# Altium PCB Boost_Converter_Pcb.PcbDoc
Units mm, origin at the board's own origin, x right, y up, seen from the top; angles counter-clockwise.
Board outline 90.25 x 70.35 mm, 2 copper layers (Top Layer, Bottom Layer); 38 components, 31 nets, 92 pads, 0 vias.
Unrouted connection lines stored in the file: 1.
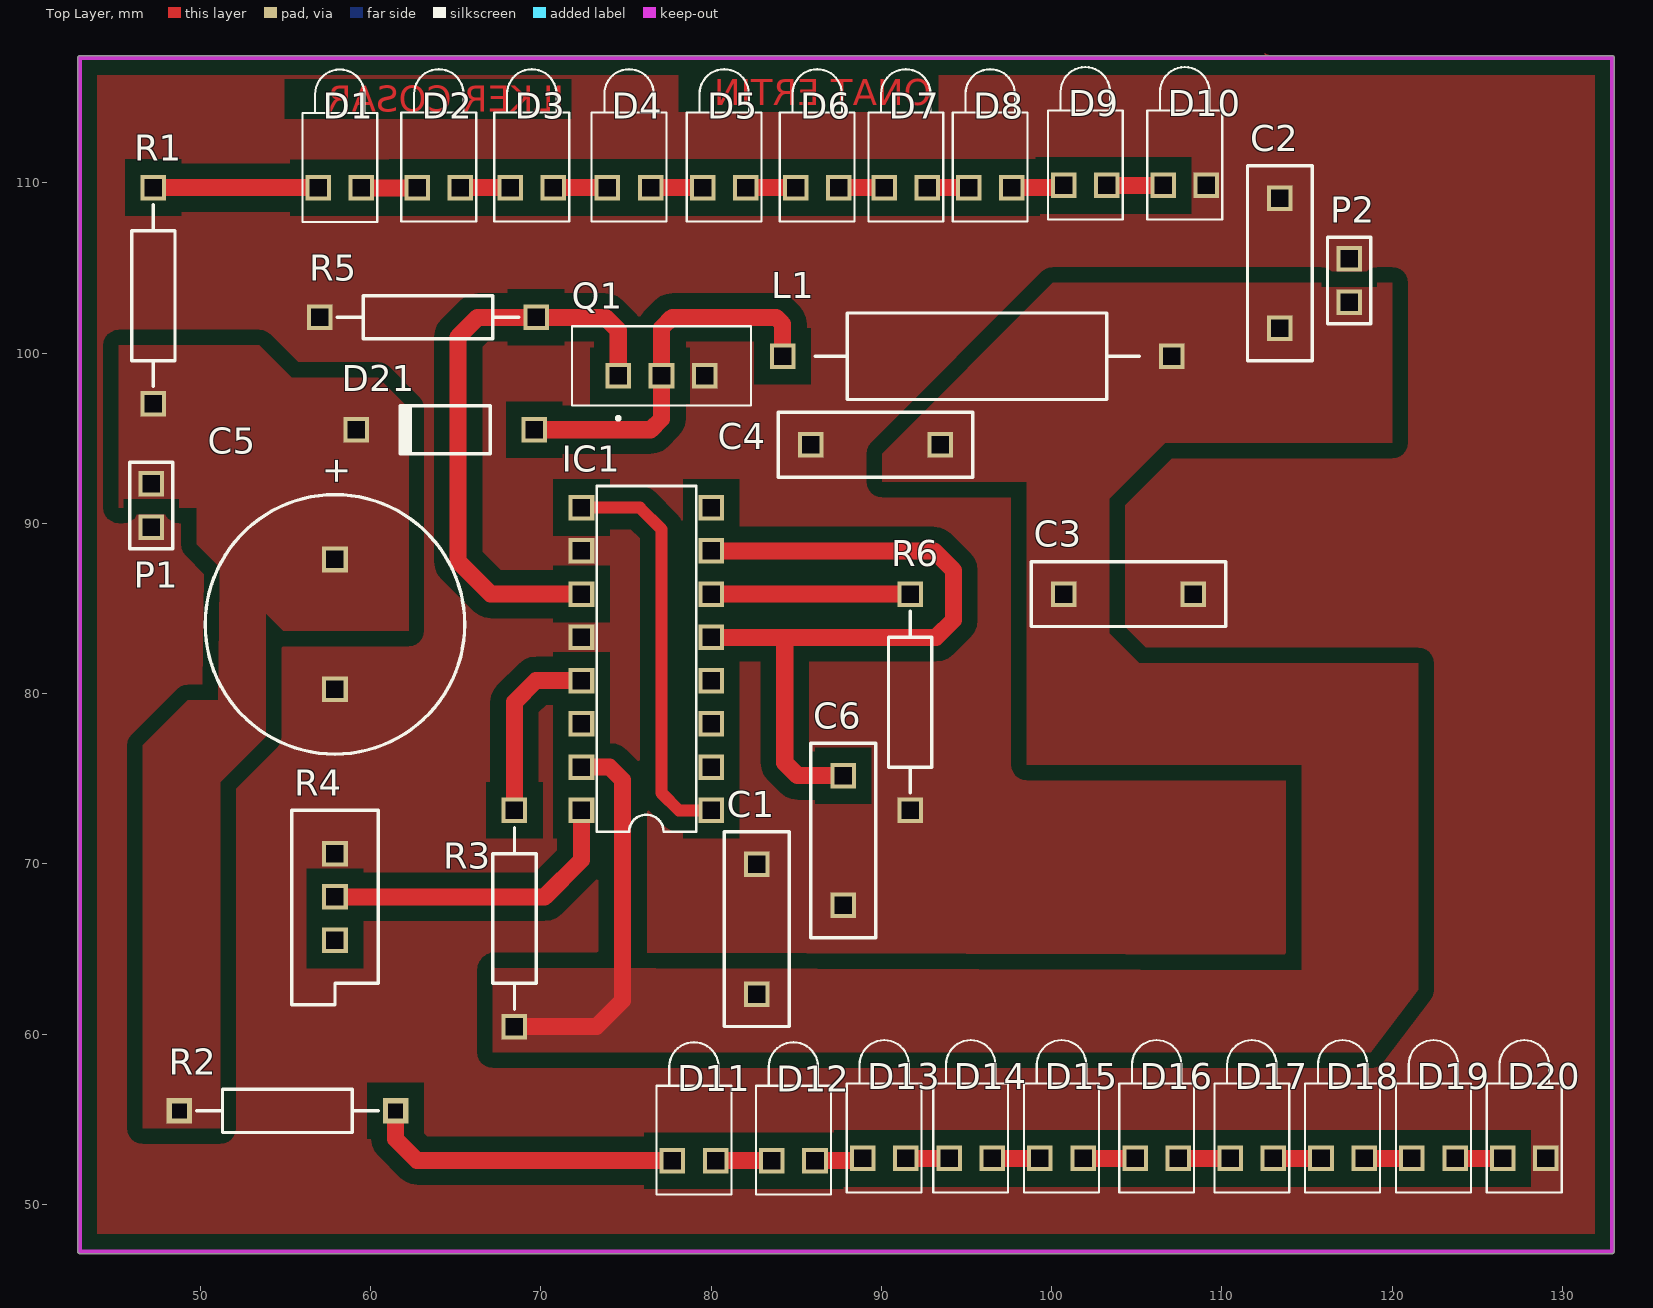
[diagram p0: Top Layer view]
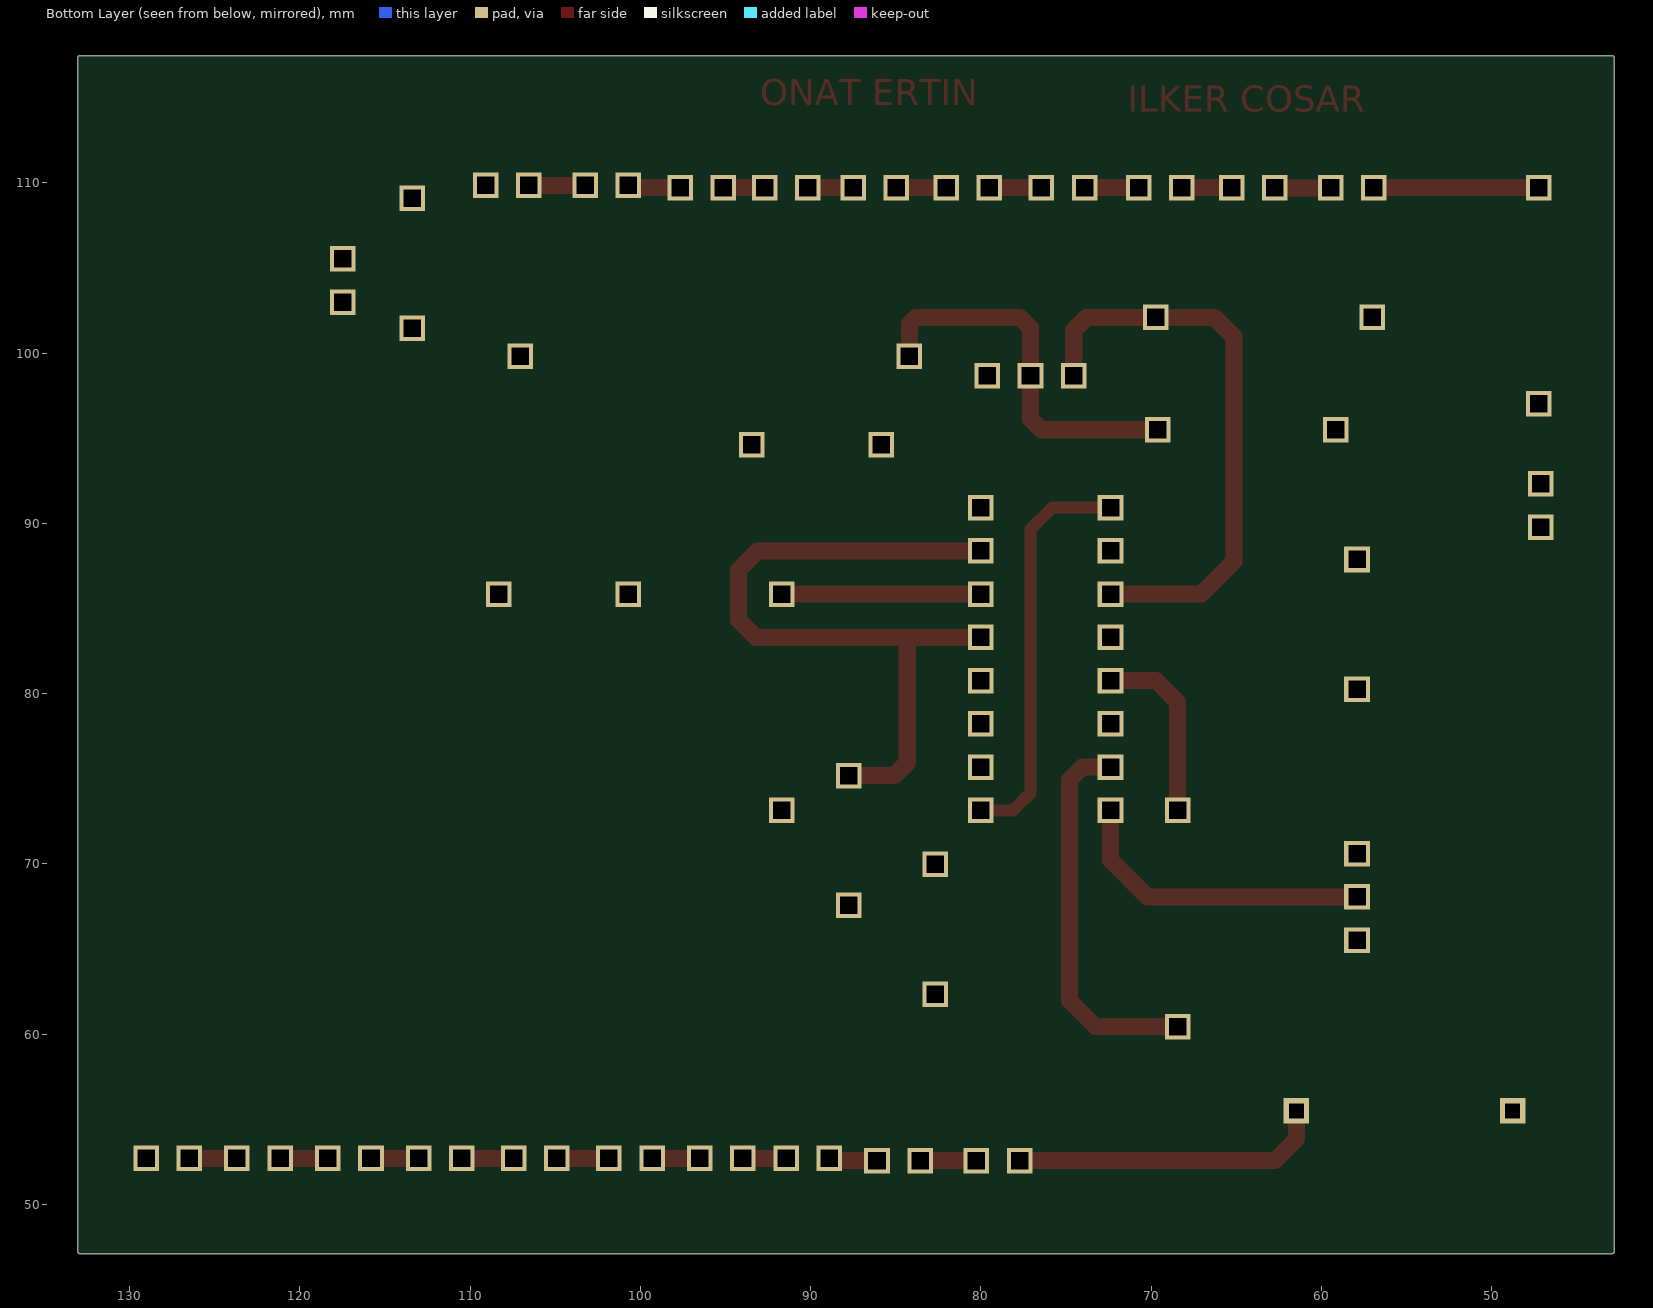
[diagram p1: Bottom Layer view, seen from below]

## Layer stack, top to bottom
Top Solder: solder mask 0.0102, Solder Resist, Dk 3.5
Top Layer: signal copper 0.0356
Dielectric 1: dielectric 0.32, FR-4, Dk 4.8
Bottom Layer: signal copper 0.0356
Bottom Solder: solder mask 0.0102, Solder Resist, Dk 3.5

## Board outline
42.926,47.119 cw(c42.926,47.244) 42.812,47.296 cw(c42.926,47.348) 42.801,47.348 42.801,117.348 cw(c42.926,117.348) 42.926,117.473 132.926,117.473 cw(c132.926,117.348) 133.051,117.348 133.051,117.347 133.051,47.244 cw(c132.926,47.244) 132.926,47.119

## Design rules (kind name [scope] priority, off if disabled: settings)
Clearance [All] p1: gap=0.152 ignorepadtopadclearanceinfootprint=TRUE except(0.9: Arc-Fill Arc-Poly Arc-Region Track-Fill Track-Poly Track-Region SMDPad-Fill SMDPad-Poly SMDPad-Region THPad-Fill THPad-Poly THPad-Region Via-Fill Via-Poly Via-Region Fill-Fill Fill-Poly Fill-Region Poly-Poly Poly-Region Region-Region)
HoleToHoleClearance [All] p1: gap=0.152 allowstackedmicrovias=TRUE
MinimumSolderMaskSliver [All] p1: minsoldermaskwidth=0.152
PolygonConnect [All] p1: connectstyle=Direct reliefconductorwidth=1 reliefentries=4 polygonreliefangle="90 Angle" airgapwidth=0.5
RoomDefinition Boost_Converter [InComponentClass('Boost_Converter')] p1: confinementstyle=ConfineIn formatcopy=TRUE lockcomponents=FALSE outline 43.053,46.863 132.588,46.863 132.588,117.221 43.053,117.221
RoutingVias [All] p1: holewidth=0.711 width=1.27 viastyle="Through Hole" minholewidth=0.711 minwidth=1.27 maxholewidth=0.711 maxwidth=1.27
SilkToSilkClearance [All] p1: silktosilkclearance=0.152
SilkToSolderMaskClearance [IsPad] p1: minsilkscreentomaskgap=0.152 clearancetoexposedcopper=TRUE
SolderMaskExpansion [All] p1: expansion=0.102
Width [All] p1: maxlimit=2 minlimit=0.5 preferedwidth=1
26 further rules are at their usual default settings.

## Classes and differential pairs
component class Boost_Converter: C1 C2 C3 C4 C5 C6 D1 D2 D3 D4 D5 D6 D7 D8 D9 D10 D11 D12 D13 D14 D15 D16 D17 D18 D19 D20 D21 IC1 L1 P1 P2 Q1 R3 R4 R5 R6

## Components (designator, comment, footprint, x,y, rotation, side; value= is the part's Value field where it differs from the comment)
C1 "Cap" RAD-0.3 82.677,66.167 r270 top value=100uF
C2 "Cap" RAD-0.3 113.411,105.283 r270 top value=22uF
C3 "Cap" RAD-0.3 104.521,85.852 r180 top value=100nF
C4 "Cap" RAD-0.3 89.662,94.615 r0 top value=47nF
C5 "Cap Pol1" RB7.6-15 57.912,84.074 r90 top value=100pF
C6 "Cap" RAD-0.3 87.757,71.374 r90 top value=100nF
D1 "LED1" LED-1 58.195,109.713 r90 top
D2 "LED1" LED-1 64.008,109.728 r90 top
D3 "LED1" LED-1 69.469,109.728 r90 top
D4 "LED1" LED-1 75.184,109.728 r90 top
D5 "LED1" LED-1 80.772,109.728 r90 top
D6 "LED1" LED-1 86.233,109.728 r90 top
D7 "LED1" LED-1 91.44,109.728 r90 top
D8 "LED1" LED-1 96.393,109.728 r90 top
D9 "LED1" LED-1 101.981,109.855 r90 top
D10 "LED1" LED-1 107.823,109.855 r90 top
D11 "LED1" LED-1 78.994,52.578 r90 top
D12 "LED1" LED-1 84.836,52.578 r90 top
D13 "LED1" LED-1 90.17,52.705 r90 top
D14 "LED1" LED-1 95.25,52.705 r90 top
D15 "LED1" LED-1 100.584,52.705 r90 top
D16 "LED1" LED-1 106.172,52.705 r90 top
D17 "LED1" LED-1 111.76,52.705 r90 top
D18 "LED1" LED-1 117.094,52.705 r90 top
D19 "LED1" LED-1 122.428,52.705 r90 top
D20 "LED1" LED-1 127.762,52.705 r90 top
D21 "Diode 1N4007" DO-41 64.389,95.504 r180 top
IC1 "SG3525A" SG3525A 80.01,73.152 r90 top
L1 "Inductor Iron" AXIAL-0.9 95.631,99.822 r180 top value=10mH
P1 "Header 2" HDR1X2 47.117,92.329 r270 top
P2 "Header 2" HDR1X2 117.475,102.997 r90 top
Q1 "IRF540" TO254P1052X465X1989-3 74.549,98.679 r0 top
R1 "Res Semi" AXIAL-0.5#1 47.244,103.378 r270 top value=1K
R2 "Res Semi" AXIAL-0.5#2 55.118,55.499 r180 top value=1K
R3 "Res Semi" AXIAL-0.5#1 68.453,66.802 r270 top value=1K
R4 "RPot" VR5 57.912,68.072 r270 top value=100K
R5 "Res Semi" AXIAL-0.5#1 63.373,102.108 r0 top value=10K
R6 "Res Semi" AXIAL-0.5#1 91.694,79.502 r90 top value=3.5K

## Footprints (in the part's own frame and the unit in brackets; to place one, negate y for a bottom-side part, rotate by r counter-clockwise, add the part's x,y. Pads: shape width x height; smd on the part's side, far side on the other; paste and mask are expansions set on the pad)
AXIAL-0.5#1 [mm] "Axial Device, Thru-Hole; 2 Leads; 0.5 in Pin Spacing"
  rect 1.5x1.5 hole 1 square: 1(-6.35,0) 2(6.35,0)
  silkscreen extent -5.33,-1.27 5.33,1.27
AXIAL-0.5#2 [mm] "Axial Device, Thru-Hole; 2 Leads; 0.5 in Pin Spacing"
  rect 1.5x1.5 hole 0.85 square: 1(-6.35,0) 2(6.35,0)
  silkscreen extent -5.33,-1.27 5.33,1.27
AXIAL-0.9 [mm] "Axial Device, Thru-Hole; 2 Leads; 0.9 in Pin Spacing"
  rect 1.5x1.5 hole 1 square: 1(-11.43,0) 2(11.43,0)
  silkscreen extent -9.53,-2.54 9.53,2.54
DO-41 [mm] "Diode, Axial; Body 5.2 x 2.7 mm (LxDia. max), Lead Dia. 0.86 mm (max)"
  rect 1.5x1.5 hole 1 square: 1(-5.23,0) 2(5.23,0)
  silkscreen extent -2.65,-1.4 2.75,1.4
HDR1X2 [mm] "Connector; Header; 2 Position"
  rect 1.5x1.5 hole 1 square: 1(0,0) 2(2.54,0)
  silkscreen extent -1.27,-1.27 3.81,1.27
LED-1 [mm] "LED; 2 Leads"
  rect 1.5x1.5 hole 1 square: 1(0,1.27) 2(0,-1.27)
  silkscreen extent -2,-2.2 6.95,2.2
RAD-0.3 [mm] "Radial Cap, Thru-Hole; 2 Leads; 0.3 in Pin Spacing"
  rect 1.5x1.5 hole 1 square: 1(-3.81,0) 2(3.81,0)
  silkscreen extent -5.71,-1.91 5.71,1.91
RB7.6-15 [mm] "Polarized Capacitor (Radial); 2 Leads"
  rect 1.5x1.5 hole 1 square: 1(3.81,0) 2(-3.81,0)
  silkscreen extent -7.62,-7.62 7.62,7.62
SG3525A [mm] "IC"
  rect 1.5x1.5 hole 1 square: 1(0,0) 2(2.54,0) 3(5.08,0) 4(7.62,0) 5(10.16,0) 6(12.7,0) 7(15.24,0) 8(17.78,0) 9(17.78,7.62) 10(15.24,7.62) 11(12.7,7.62) 12(10.16,7.62) 13(7.62,7.62) 14(5.08,7.62) 15(2.54,7.62) 16(0,7.62)
  silkscreen extent -1.27,0.89 19.05,6.73, body extent -0.64,-0.38 18.54,7.49, height 4.43
TO254P1052X465X1989-3 [mm]
  rect 1.5x1.5 hole 1 square: 1(0,0) 2(2.54,0) 3(5.08,0)
  silkscreen extent -2.72,-2.6 7.8,2.91
VR5 [mm] "Thru-Hole; 3 Leads"
  rect 1.5x1.5 hole 1 square: 1(-2.54,0) 2(0,0) 3(2.54,0)
  silkscreen extent -5.08,-2.54 6.35,2.54

## Part data
C1 C2 C3 C4 C6: "Capacitor", LatestRevisionDate=17-Jul-2002, LatestRevisionNote="Re-released for DXP Platform.", PackageDescription="Radial Cap, Thru-Hole; 2 Leads; 0.3 in Pin Spacing", PackageReference=RAD-0.3, Published=8-Jun-2000, Publisher="Altium Limited"
C5: "Polarized Capacitor (Radial)", LatestRevisionDate=17-Jul-2002, LatestRevisionNote="Re-released for DXP Platform.", PackageDescription="Polarized Capacitor (Radial); 2 Leads", PackageReference=RB7.6-15, Published=8-Jun-2000, Publisher="Altium Limited"
D1 D2 D3 D4 D5 D6 D7 D8 D9 D10 D11 D12 D13 D14 D15 D16 D17 D18 D19 D20: "Typical RED GaAs LED", LatestRevisionDate=08-Jul-2005, LatestRevisionNote="Mech Layer 1 removed.", PackageDescription="LED; 2 Leads", PackageReference=LED-1, Published=8-Jun-2000, Publisher="Altium Limited"
D21: "1 Amp General Purpose Rectifier", Code_JEDEC=DO-204-AL, ComponentLink1Description="Manufacturer Link", ComponentLink1URL=http://www.fairchildsemi.com/, ComponentLink2Description=Datasheet, ComponentLink2URL=http://www.fairchildsemi.com/ds/1N%2F1N4001.pdf, DatasheetVersion=1998, LatestRevisionDate=17-Jul-2002, LatestRevisionNote="Re-released for DXP Platform.", PackageDescription="Diode, Axial; Body 5.2 x 2.7 mm (LxDia. max), Lead Dia. 0.86 mm (max)", PackageReference=DO-41, PackageVersion=Aug-1999, Published=8-Jun-2000, Publisher="Altium Limited"
IC1: "PWM GENERATOR IC"
L1: "Magnetic-Core Inductor", LatestRevisionDate=17-Jul-2002, LatestRevisionNote="Re-released for DXP Platform.", PackageDescription="Axial Device, Thru-Hole; 2 Leads; 0.9 in Pin Spacing", PackageReference=AXIAL-0.9, Published=24-Mar-1999, Publisher="Altium Limited"
P1 P2: "Header, 2-Pin", LatestRevisionDate=17-Jul-2002, LatestRevisionNote="Re-released for DXP Platform.", Publisher="Altium Limited"
Q1: "N-Channel 100V 22A _Tc_ 85W _Tc_ Through Hole TO-220AB", Package="TO-220-3 Samsung", Availability=Unavailable, MF=Vishay, MP=IRF540, Price=None, SnapEDA_Link=https://www.snapeda.com/parts/IRF540/Vishay%20Siliconix/view-part/1024526/?ref=snap
R1 R2 R3 R5 R6: "Semiconductor Resistor", LatestRevisionDate=17-Jul-2002, LatestRevisionNote="Re-released for DXP Platform.", PackageDescription="Axial Device, Thru-Hole; 2 Leads; 0.5 in Pin Spacing", PackageReference=AXIAL-0.5, Published=8-Jun-2000, Publisher="Altium Limited"
R4: "Potentiometer", LatestRevisionDate=17-Jul-2002, LatestRevisionNote="Re-released for DXP Platform.", PackageDescription="Variable Resistor, Thru-Hole; 3 Leads", PackageReference=VR5, Published=8-Jun-2000, Publisher="Altium Limited", Set Position=0.5, Sim Note="Enter the Resistance value and the set point into parameter fields."

## Nets (pads, with @x,y where several pads share a name; then routed paths per layer and width w, separated by ;. In a path a pad name is that pad's centre, name@x,y a point inside that pad or via, vN(x,y) a via of type N, cw(c..) or ccw(c..) an arc to the next point about the centre after c; other vN are vias at no path point)
GND: C1.1 C2.1 C3.1 C4.1 C5.2 C6.1 D10.2 D20.2 IC1.10 IC1.12 P1.2 P2.2 Q1.3 R4.1 R5.1 R6.1
NetC6_2: C6.2 IC1.5 IC1.7 | length 42.7
  Top Layer w1: IC1.5 84.328,83.312 ; IC1.7 93.091,88.392 94.234,87.249 94.234,84.328 93.218,83.312 84.328,83.312 ; C6.2@87.122,75.184 85.09,75.184 84.328,75.946 84.328,83.312
NetD1_1: D1.1 R1.1 | length 9.7
  Top Layer w1: R1.1 56.91,109.728 D1.1
NetD1_2: D1.2 D2.1 | length 3.3
  Top Layer w1: D1.2 62.723,109.713 D2.1
NetD2_2: D2.2 D3.1 | length 2.9
  Top Layer w1: D2.2 D3.1
NetD3_2: D3.2 D4.1 | length 3.2
  Top Layer w1: D3.2 D4.1
NetD4_2: D4.2 D5.1 | length 3
  Top Layer w1: D4.2 D5.1
NetD5_2: D5.2 D6.1 | length 2.9
  Top Layer w1: D5.2 D6.1
NetD6_2: D6.2 D7.1 | length 2.7
  Top Layer w1: D6.2 D7.1
NetD7_2: D7.2 D8.1 | length 2.4
  Top Layer w1: D7.2 D8.1
NetD8_2: D8.2 D9.1 | length 3.1
  Top Layer w1: D8.2 100.584,109.728 D9.1
NetD9_2: D9.2 D10.1 | length 3.3
  Top Layer w1: D9.2 D10.1
NetD11_1: D11.1 R2.1 | length 18.4
  Top Layer w1: R2.1 61.468,53.848 62.738,52.578 D11.1
NetD11_2: D11.2 D12.1 | length 3.3
  Top Layer w1: D11.2 D12.1
NetD12_2: D12.2 D13.1 | length 2.8
  Top Layer w1: D12.2 88.773,52.578 D13.1
NetD13_2: D13.2 D14.1 | length 2.5
  Top Layer w1: D13.2 D14.1
NetD14_2: D14.2 D15.1 | length 2.8
  Top Layer w1: D14.2 D15.1
NetD15_2: D15.2 D16.1 | length 3
  Top Layer w1: D15.2 D16.1
NetD16_2: D16.2 D17.1 | length 3
  Top Layer w1: D16.2 D17.1
NetD17_2: D17.2 D18.1 | length 2.8
  Top Layer w1: D17.2 D18.1
NetD18_2: D18.2 D19.1 | length 2.8
  Top Layer w1: D18.2 D19.1
NetD19_2: D19.2 D20.1 | length 2.8
  Top Layer w1: D19.2 D20.1
NetD21_1: D21.1 L1.2 Q1.2 | length 22.5
  Top Layer w1: D21.1 76.454,95.504 77.089,96.139 Q1.2 77.089,101.473 77.724,102.108 83.82,102.108 84.201,101.727 L1.2
NetIC1_1: IC1.1 IC1.9 | length 24.1
  Top Layer w0.7: IC1.9 75.819,90.932 77.089,89.662 77.089,74.168 78.105,73.152 IC1.1
NetIC1_2: IC1.2 R4.3
NetIC1_6: IC1.6 R6.2 | length 11.7
  Top Layer w1: IC1.6 R6.2
NetIC1_11: IC1.11 Q1.1 R5.2 | length 34.1
  Top Layer w1: IC1.11 67.056,85.852 65.151,87.757 65.151,100.965 66.294,102.108 R5.2 73.787,102.108 74.549,101.346 Q1.1
NetIC1_13: IC1.13 R3.1 | length 10.8
  Top Layer w1: R3.1 68.453,79.502 69.723,80.772 IC1.13
NetIC1_16: IC1.16 R4.2 | length 18.3
  Top Layer w1: R4.2 70.231,68.072 72.39,70.231 IC1.16
VCC: C1.2 C2.2 C3.2 C4.2 IC1.15 L1.1 P2.1 R3.2 | length 22.7
  Top Layer w1: R3.2 73.279,60.452 74.803,61.976 74.803,74.93 74.041,75.692 IC1.15
Vout: C5.1 D21.2 P1.1 R1.2 R2.2
pads on no net: IC1.3 IC1.4 IC1.8 IC1.14

## Polygon pours and split planes (outlines as drawn)
GND on Top Layer "GND_L01_P124" (solid, pour order 124): 42.926,117.348 132.926,117.348 132.926,47.244 43.03,47.244 42.926,47.348
VCC on Top Layer "VCC_L01_P120" (solid, pour order 120): 67.183,63.899 67.183,58.928 118.745,58.928 121.539,62.611 121.539,63.754 121.539,75.819 114.681,75.819 114.681,63.772
Vout on Top Layer "VOUT_L01_P110" (solid, pour order 110): 51.181,89.027 51.308,88.9 53.848,88.9 53.848,77.47 51.181,74.803 51.181,54.483 46.609,54.483 46.609,76.962 49.276,79.629 51.054,79.629
Vout on Top Layer "VOUT_L01_P108" (solid, pour order 108): 45.212,100.457 53.467,100.457 55.372,98.552 60.452,98.552 62.23,96.774 62.23,83.693 54.864,83.693 49.784,88.773 49.784,90.932 45.212,90.932
VCC on Top Layer "VCC_L01_P106" (solid, pour order 106): 120.015,104.14 100.076,104.14 90.043,94.107 90.043,92.456 98.552,92.456 98.552,75.819 121.539,75.819 121.539,81.788 105.156,81.788 103.378,83.566 103.378,91.44 106.68,94.742 120.015,94.742
no net on Top Layer "NONET_L01_P076" (solid, pour order 76): 93.853,121.666
no net on Top Layer "NONET_L01_P070" (solid, pour order 70): 112.522,117.602 112.649,117.475 112.776,117.475
VCC on Top Layer "VCC_L01_P054" (solid, pour order 54): 104.394,82.296
no net on Top Layer "GND_Poly" (solid, pour order 26): 60.198,109.601
no net on Top Layer "GND_Poly" (solid, pour order 16): 98.806,94.361
no net on Top Layer "GND_Poly" (solid, pour order 12): 103.251,100.711
no net on Top Layer "GND_Poly" (solid, pour order 8): 61.064,95.504
no net on Top Layer "GND_Poly" (solid, pour order 4): 57.277,97.663
no net on Top Layer "GND_Poly" (solid, pour order 2): 61.064,95.504

## Keep-outs
Top Layer:
  lines w0.25: 42.926,47.244 132.926,47.244 132.926,117.348 42.926,117.348 42.926,47.348

## Other copper
Top Layer:
  text "ONAT ERTIN" at 92.964,114.554 h1.52
  text "ILKER COSAR" at 71.374,114.173 h1.52

## Text inside footprints (layer, text, board x,y; h text height)
C5: Top Overlay "+" at 58.649,92.206 h1.5 r90